# Altium PCB TL200_V1.1-后板.PcbDoc
Units mm, origin at the board's own origin, x right, y up, seen from the top; angles counter-clockwise.
Board outline 61.7 x 69.78 mm, 2 copper layers (Top Layer, Bottom Layer); 54 components, 38 nets, 158 pads, 350 vias.
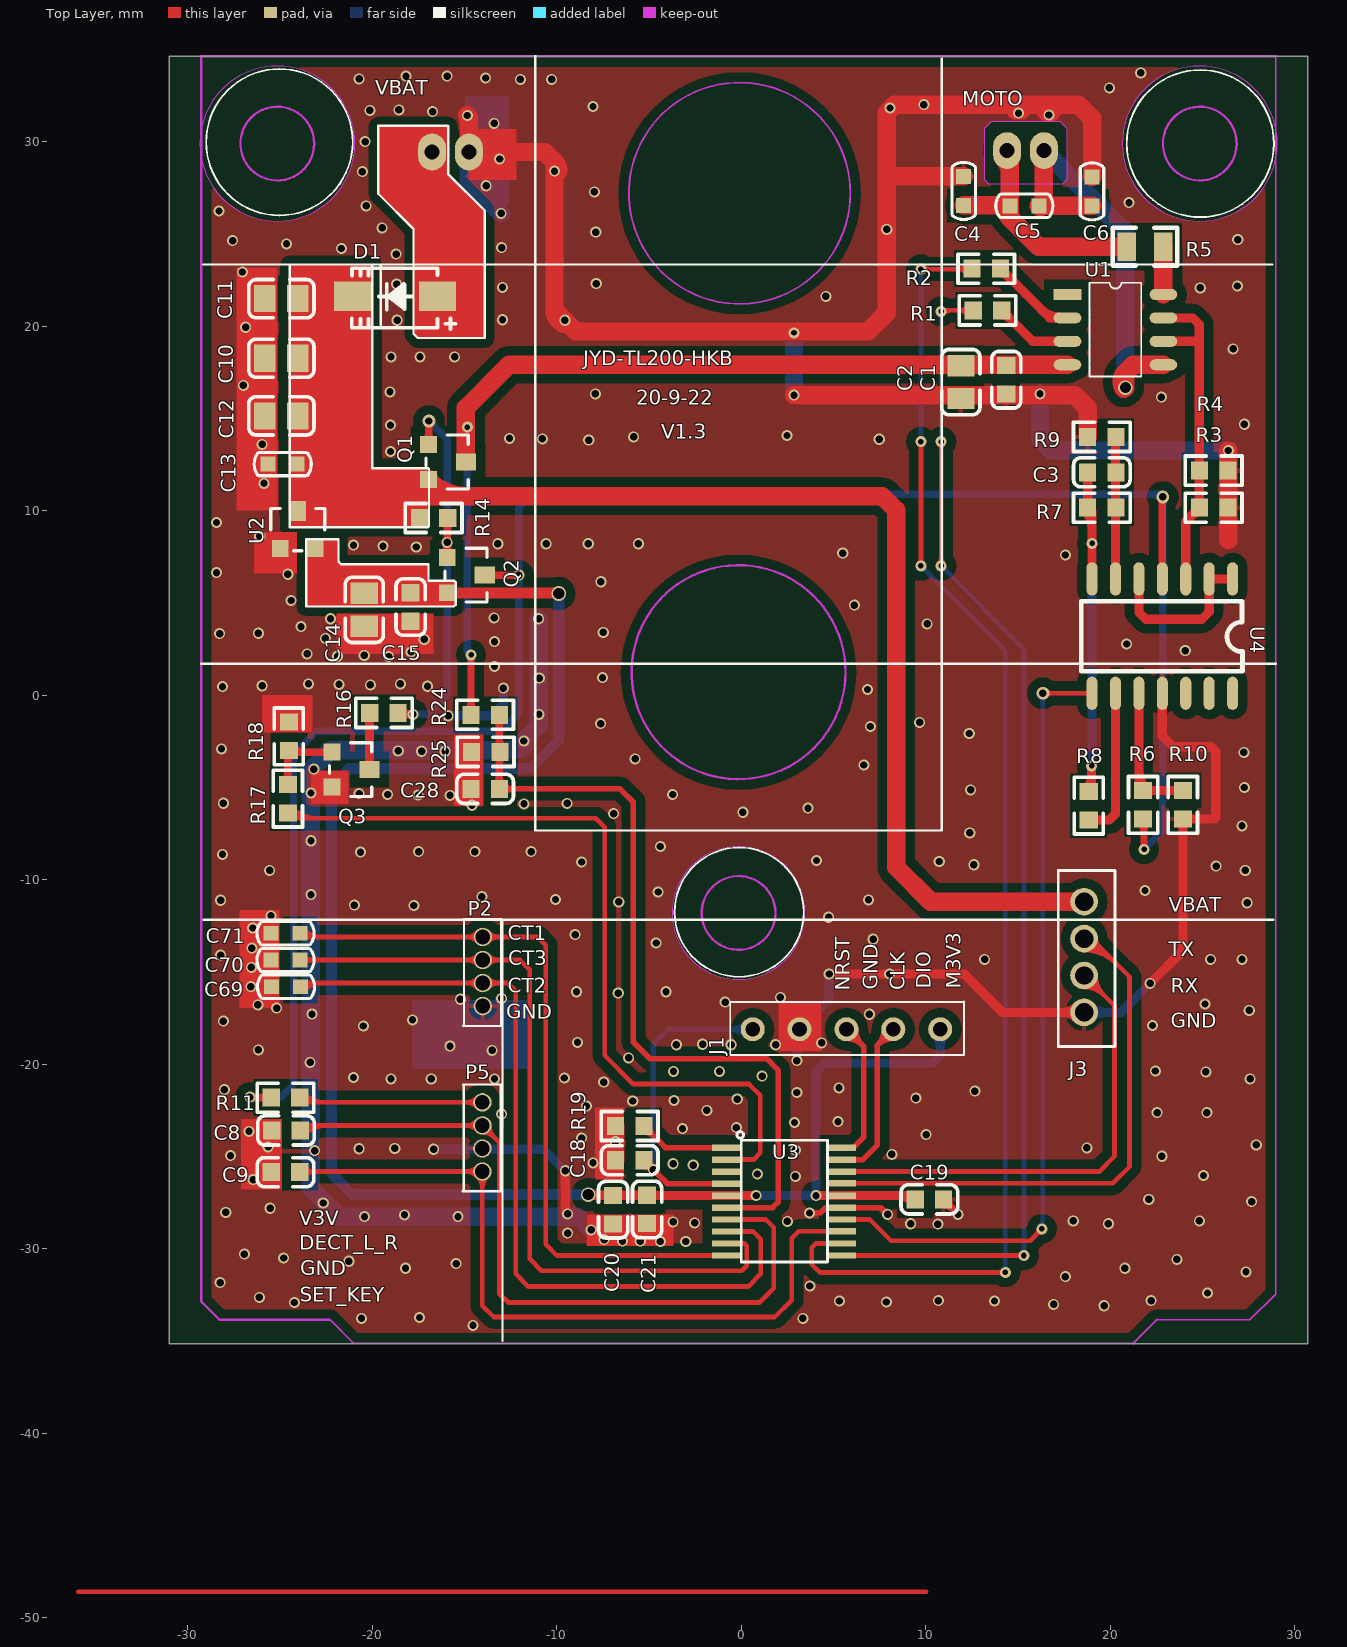
[diagram p0: Top Layer view]
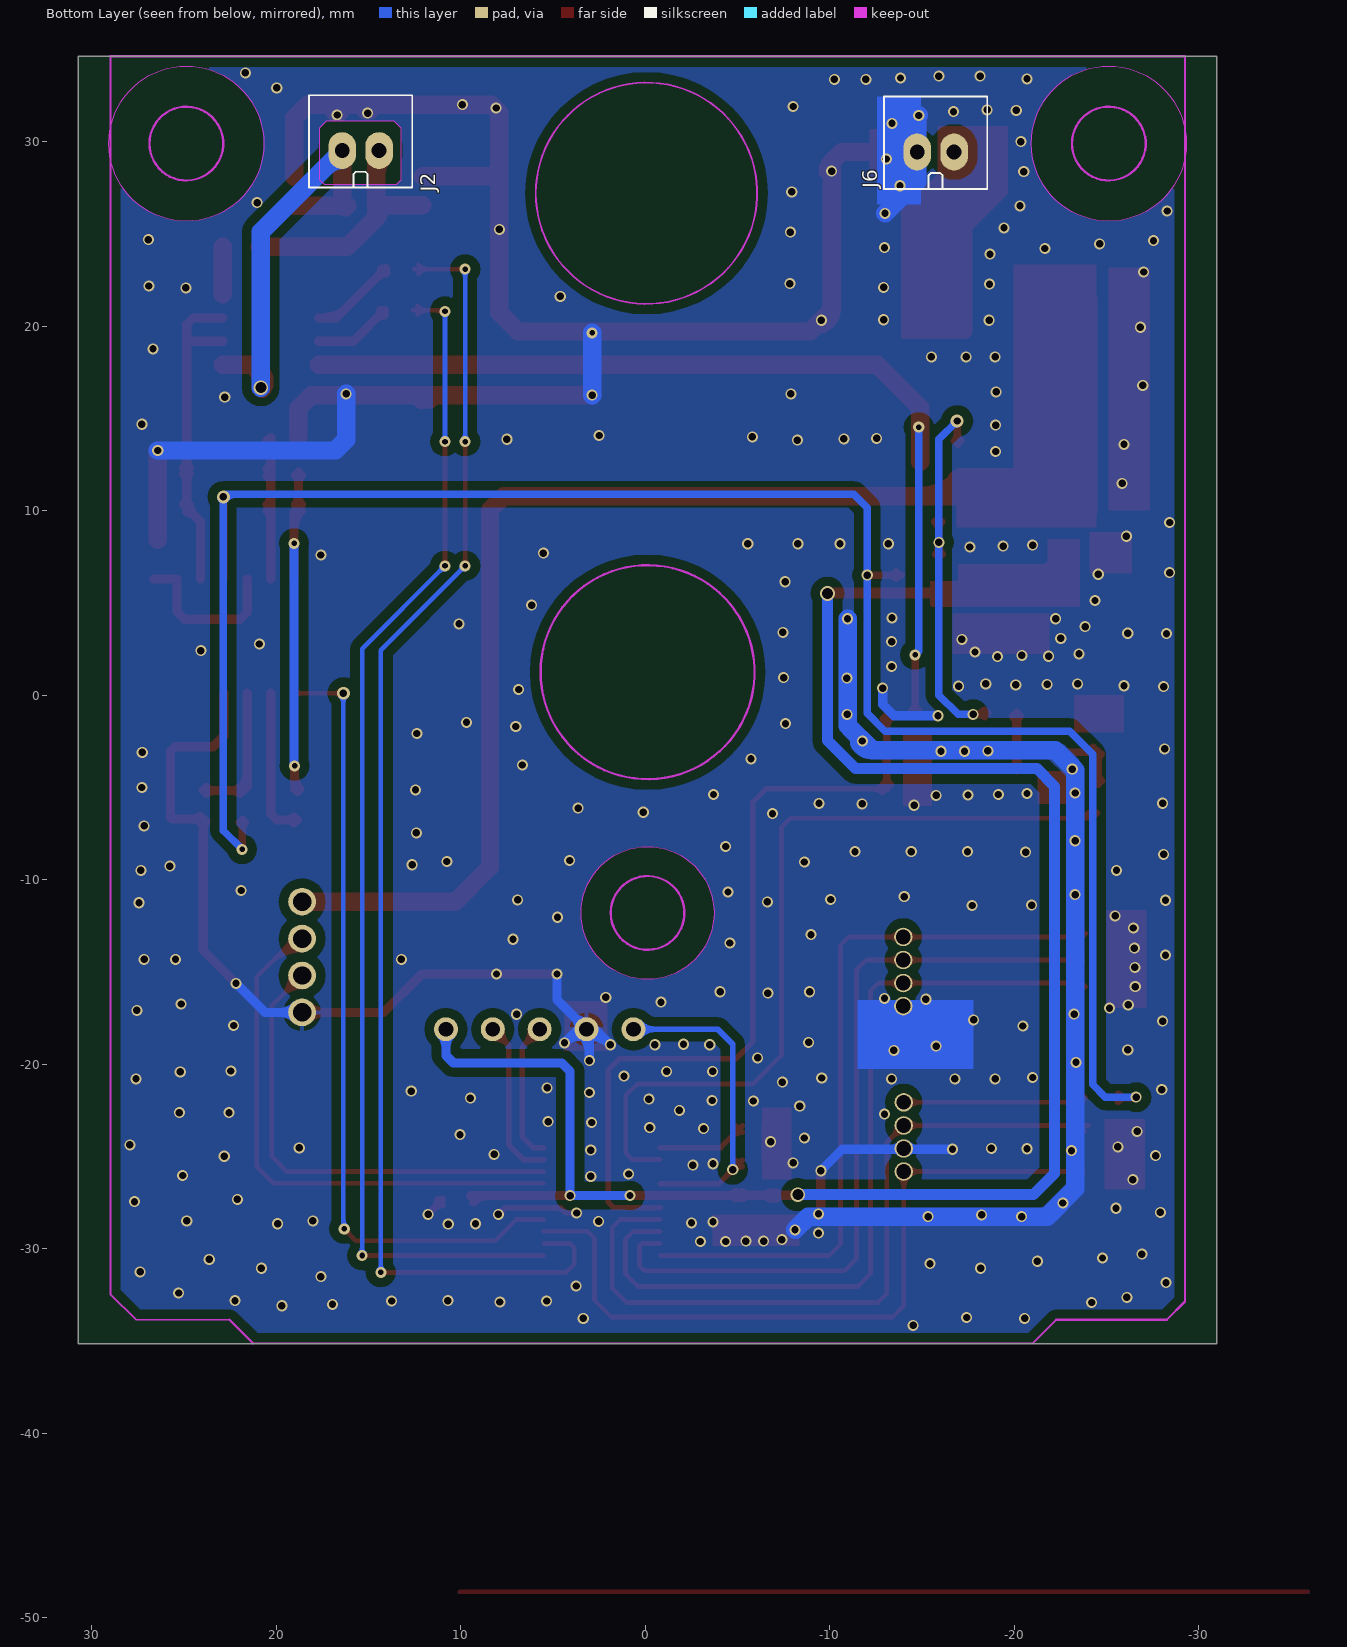
[diagram p1: Bottom Layer view, seen from below]
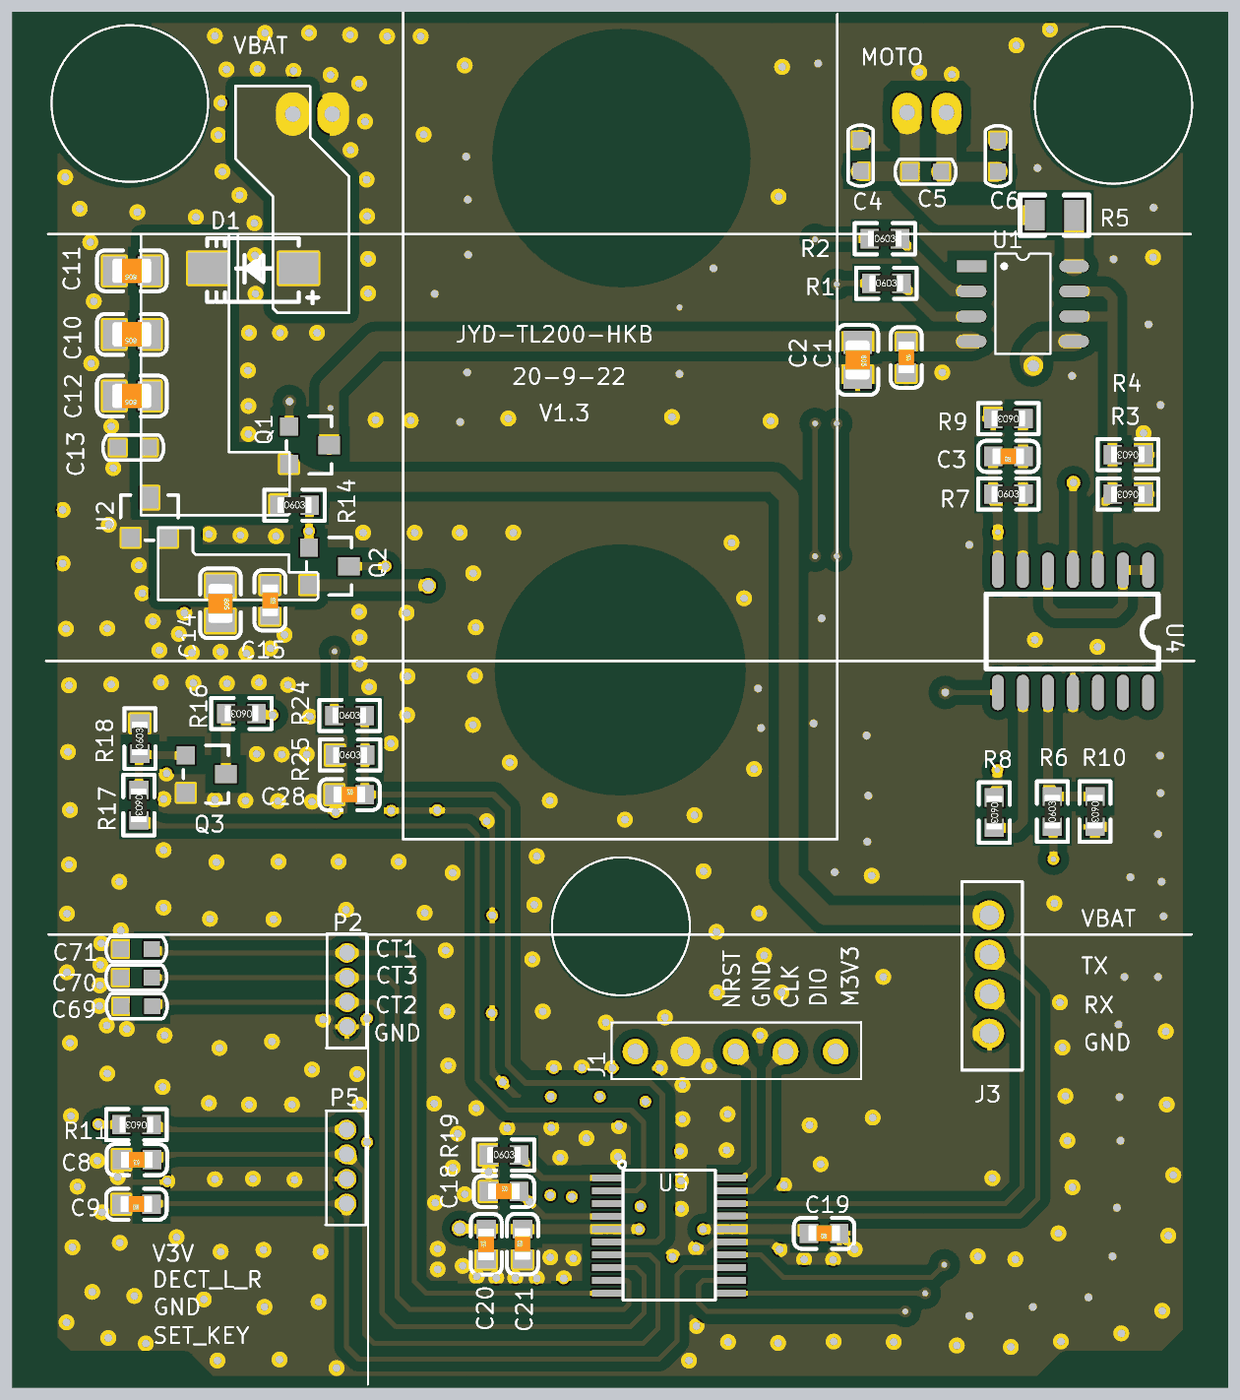
[diagram p2: 3D render of the assembled board from above, using the file's embedded part models]

## Layer stack, top to bottom
Top Layer: signal copper 0.0356
Dielectric: core 0.32, FR-4, Dk 4.8
Bottom Layer: signal copper 0.0356

## Board outline
-30.986,34.62 -30.986,-35.158 30.716,-35.158 30.716,34.62 -30.986,34.62

## Design rules (kind name [scope] priority, off if disabled: settings)
Clearance Clearance_1 [All] p1: gap=0.1
Clearance [All] p2 off: gap=0.5
ComponentClearance [All] p1: gap=0 collisioncheckmode=3 verticalgap=0 showdistances=FALSE
FabricationTestpoint [(IsPad And (OnTopLayer Or OnBottomLayer))] p1: side=3 testpointundercomponent=TRUE minsize=1.016 maxsize=2.54 preferedsize=1.524 minholesize=0 maxholesize=1.016 preferedholesize=0.813 testpointgrid=0.025 allowsidetop=TRUE allowsidebottom=TRUE usegrid=TRUE gridtolerance=0
HoleToHoleClearance [All] p1: gap=0 allowstackedmicrovias=TRUE
MinimumSolderMaskSliver [All] p1: minsoldermaskwidth=0
PolygonConnect PolygonConnect_1 [IsVia] p1: connectstyle=Direct reliefconductorwidth=0.254 reliefentries=4 polygonreliefangle="90 Angle" airgapwidth=0.254
PolygonConnect [All] p2: connectstyle=Relief reliefconductorwidth=0.254 reliefentries=4 polygonreliefangle="90 Angle" airgapwidth=0.254
RoutingVias [All] p1: holewidth=0.3 width=0.6 viastyle="Through Hole" minholewidth=0.2 minwidth=0.5 maxholewidth=0.4 maxwidth=0.7
SilkToSilkClearance [All] p1: silktosilkclearance=0
SilkToSolderMaskClearance [IsPad] p1: minsilkscreentomaskgap=0 clearancetoexposedcopper=TRUE
SolderMaskExpansion [All] p1: expansion=0.102
Width [All] p1: maxlimit=2 minlimit=0.2 preferedwidth=0.254
22 further rules are at their usual default settings.

## Components (designator, comment, footprint, x,y, rotation, side; value= is the part's Value field where it differs from the comment)
C1 "0.1uF" LC-0603_C 14.376,17.094 r270 top
C2 "22uF" LC-0805_C 11.913,16.967 r270 top
C3 "0.1uF" LC-0603_C 19.558,12.078 r180 top
C4 "100nF" C0603 12.065,27.33 r270 top
C5 "100nF" C0603 15.354,26.518 r0 top
C6 "100nF" C0603 19.025,27.305 r90 top
C8 "10nF" LC-0603_C -24.663,-23.597 r180 top
C9 "100nF" LC-0603_C -24.689,-25.857 r180 top
C10 "47uF/16V" LC-0805_C -24.917,18.263 r180 top
C11 "22uF/16V" LC-0805_C -24.917,21.488 r180 top
C12 "10uF/16V" LC-0805_C -24.917,15.138 r180 top
C13 "100nF" C0603 -24.841,12.522 r180 top
C14 "10uF/10V" LC-0805_C -20.422,4.623 r270 top
C15 "100nF" LC-0603_C -17.907,4.775 r270 top
C18 "100nF" LC-0603_C -6.033,-25.208 r0 top
C19 "1uF/6.3V" LC-0603_C 10.211,-27.33 r180 top
C20 "1uF/6.3V" LC-0603_C -6.934,-27.889 r90 top
C21 "100nF" LC-0603_C -5.094,-27.875 r90 top
C28 "10NF" LC-0603_C -13.868,-5.08 r0 top
C69 "10nF" C0603 -24.663,-15.808 r180 top
C70 "10nF" C0603 -24.689,-14.36 r180 top
C71 "10nF" C0603 -24.689,-12.912 r180 top
D1 "SS14" M7 -16.459,21.615 r180 top
J1 "2.54mm烧录口" "5P-2.54mm - duplicate" 10.795,-18.11 r180 top
J2 "CON2" 2PIN-2.0 15.418,29.515 r180 bottom locked
J3 "CON4/NP" 4p-2.0xx 18.593,-17.196 r90 top
J6 "CON2" 2PIN-2.0 -15.748,29.439 r180 bottom locked
P2 "Header 4" 4P-1.25 -13.995,-13.106 r270 top locked
P5 "Header 4" 4P-1.25 -14.021,-22.073 r270 top locked
Q1 "SI2301" "SOT-23 - GDS" -15.926,12.644 r270 top
Q2 "SI2301" "SOT-23 - GDS" -14.91,6.502 r270 top
Q3 "PMBT3904" "SOT-23 - BCE" -21.158,-4.039 r270 top
R1 "10K" LC-0603_R 13.36,20.853 r0 top
R2 "10K" LC-0603_R 13.291,23.114 r0 top
R3 "0R68" LC-0603_R 25.621,10.16 r180 top
R4 "0R68" LC-0603_R 25.621,12.167 r180 top
R5 "2.2R" 0805_R 21.895,24.308 r0 top
R6 "10K" LC-0603_R 21.793,-5.944 r90 top
R7 "100K" LC-0603_R 19.558,10.16 r0 top
R8 "100K" LC-0603_R 18.847,-5.994 r270 top
R9 "10K" LC-0603_R 19.558,13.995 r180 top
R10 "100K" LC-0603_R 23.952,-5.944 r270 top
R11 "100K" LC-0603_R -24.689,-21.819 r180 top
R14 "100K" LC-0603_R -16.662,9.601 r0 top
R16 "1K" LC-0603_R -19.355,-0.965 r180 top
R17 "4.7K" LC-0603_R -24.562,-5.613 r270 top
R18 "10K" LC-0603_R -24.511,-2.235 r90 top
R19 "10K" LC-0603_R -6.033,-23.354 r0 top
R24 "20K1%" LC-0603_R -13.868,-1.067 r0 top
R25 "10K1%" LC-0603_R -13.843,-3.073 r0 top
U1 "CP2117" SOP8 20.295,19.812 r0 top
U2 "jc5333" SOT-23-3L -24.028,8.966 r0 top
U3 "STM32F030F4P6" TSSOP20L1xx -0.014,-24.523 r0 top
U4 "LMV324B-SR" SOIC-14_L8.7-W3.9-P1.27-LS6.0-BL 22.835,3.2 r180 top

## Footprints (in the part's own frame and the unit in brackets; to place one, negate y for a bottom-side part, rotate by r counter-clockwise, add the part's x,y. Pads: shape width x height; smd on the part's side, far side on the other; paste and mask are expansions set on the pad)
2PIN-2.0 [mm]
  oval 1.5x2 hole 0.8: 1(-1,0) 2(1,0)
  silkscreen extent -2.8,-2 2.79,3
4P-1.25 [mm]
  round 1 hole 0.8: 1(0,0) 2(1.25,0) 3(2.5,0) 4(3.75,0)
  silkscreen extent -0.97,-1.07 4.83,0.99
4p-2.0xx [mm]
  round 1.5 hole 1: 1(0,0) 2(2,0) 3(4,0) 4(6,0)
  silkscreen extent -1.85,-1.68 7.7,1.4
"5P-2.54mm - duplicate" [mm]
  round 1.3 hole 0.8: 1(0,0) 2(2.54,0) 3(5.08,0) 4(7.62,0) 5(10.16,0)
  silkscreen extent -1.3,-1.5 11.38,1.4
0805_R [mm]
  rect 1x1.55 smd: 1(-1,0) 2(1,0)
  silkscreen extent -1.75,-1.02 1.75,1.02
C0603 [mil]
  rect 32x31.5 smd: 1(-31,0) 2(31,0)
  silkscreen extent -61,-25 61,25
LC-0603_C [mm]
  rect 0.93x0.98 smd: 1(-0.77,0) 2(0.77,0)
  silkscreen extent -1.53,-0.79 1.54,0.79, body extent -0.8,-0.4 0.8,0.4, height 0.3
LC-0603_R [mm]
  rect 0.93x0.98 smd: 1(-0.77,0) 2(0.77,0)
  silkscreen extent -1.53,-0.79 1.54,0.79, body extent -0.85,-0.4 0.85,0.4, height 0.56
LC-0805_C [mm]
  rect 1.16x1.47 smd: 1(-0.89,0) 2(0.89,0)
  silkscreen extent -1.77,-1.04 1.77,1.04, body extent -1,-0.62 1,0.63, height 0.77
M7 [mm]
  rect 2x1.6 smd: A(0,0) K(4.6,0)
  silkscreen extent -1,-1.53 4.64,1.78
SOIC-14_L8.7-W3.9-P1.27-LS6.0-BL [mm]
  oval 0.6x1.798 smd: 1(-3.81,-3.1) 2(-2.54,-3.1) 3(-1.27,-3.1) 4(0,-3.1) 5(1.27,-3.1) 6(2.54,-3.1) 7(3.81,-3.1) 8(3.81,3.1) 9(2.54,3.1) 10(1.27,3.1) 11(0,3.1) 12(-1.27,3.1) 13(-2.54,3.1) 14(-3.81,3.1)
  silkscreen extent -4.34,-1.9 4.4,1.91
SOP8 [mm]
  rect 1.5x0.6 smd mask+0.05: 1(-2.6,1.905)
  oval 1.5x0.6 smd mask+0.05: 2(-2.6,0.635) 3(-2.6,-0.635) 4(-2.6,-1.905) 5(2.6,-1.905) 6(2.6,-0.635) 7(2.6,0.635) 8(2.6,1.905)
  round 0.4 on Top Overlay mask+0.05: ""(-0.949,1.905)
  silkscreen extent -1.4,-2.54 1.4,2.54
"SOT-23 - BCE" [mil]
  rect 36x36 smd: B(-37.4,-40) E(37.4,-40)
  rect 36x43.31 smd: C(0,40)
  silkscreen extent -57,-45 58,45
"SOT-23 - GDS" [mil]
  rect 36x43.31 smd: D(0,40)
  rect 36x36 smd: G(-37.4,-40) S(37.4,-40)
  silkscreen extent -57,-45 58,45
SOT-23-3L [mil]
  rect 36x36 smd: 1(-37.4,-40) 2(37.4,-40)
  rect 36x43.31 smd: 3(0,40)
  silkscreen extent -57,-45 58,45
TSSOP20L1xx [mm]
  rect 1.5x0.35 smd: 1(-0.8,0) 2(-0.8,-0.65) 3(-0.8,-1.3) 4(-0.8,-1.95) 5(-0.8,-2.6) 6(-0.8,-3.25) 7(-0.8,-3.9) 8(-0.8,-4.55) 9(-0.8,-5.2) 10(-0.8,-5.85) 11(5.5,-5.85) 12(5.5,-5.2) 13(5.5,-4.535) 14(5.5,-3.9) 15(5.5,-3.25) 16(5.5,-2.6) 17(5.5,-1.935) 18(5.5,-1.3) 19(5.5,-0.65) 20(5.5,0)
  silkscreen extent -0.21,-6.2 4.7,0.87

## Part data
C1 C2 C3 C15 C69 C70 C71: library part CAP-NP, "Capacitor, Ceramic"
C4 C5 C6 C8 C9 C13 C18 C19 C20 C21 C28: library part "CAP NP"
C10 C11: library part "Cap Pol3", "Polarized Capacitor (Surface Mount)"
C12 C14: library part CAP-P, "Capacitor, tolerance ±20%"
D1: library part D
J1: library part "Header 5", "Header, 5-Pin"
J3: library part CON4
P2 P5: "Header, 4-Pin"
Q1 Q2: library part PWRMOSFET_EP_DGS_0
R1 R2 R7 R8 R9: library part Pro71C3.TMP_UnNamed_1
R3 R4 R5 R19 R24 R25: library part R_Dup1
R6 R10 R14 R16 R17 R18: library part R
R11: library part Res2, "Resistor"
U1: library part AM24LC02_0
U2: library part XC6206P302M
U3: library part Component_1

## Via types
v1: diameter 0.6, hole 0.4, Top Layer to Bottom Layer, 289 vias
v2: diameter 0.6, hole 0.4, Top Layer to Bottom Layer, tented both sides, 40 vias
v3: diameter 0.6, hole 0.3, Top Layer to Bottom Layer, tented both sides, 12 vias
v4: diameter 0.6, hole 0.3, Top Layer to Bottom Layer, 3 vias
v5: diameter 0.8, hole 0.6, Top Layer to Bottom Layer, 3 vias
v6: diameter 0.7, hole 0.4, Top Layer to Bottom Layer, tented both sides, 2 vias
v7: diameter 0.7, hole 0.4, Top Layer to Bottom Layer, 1 vias

## Nets (pads, with @x,y where several pads share a name; then routed paths per layer and width w, separated by ;. In a path a pad name is that pad's centre, name@x,y a point inside that pad or via, vN(x,y) a via of type N, cw(c..) or ccw(c..) an arc to the next point about the centre after c; other vN are vias at no path point)
BAT_DET: C28.2 R24.2 R25.2 U3.6 | length 48.4
  Top Layer w0.3: C28.2 -6.553,-5.08 -5.842,-5.791 -5.842,-18.796 -4.928,-19.71 1.397,-19.71 2.007,-20.32 2.007,-27.483 1.717,-27.773 U3.6 ; C28.2@-12.876,-5.303 cw(c-12.338,-5.84) -12.338,-5.08 cw(c-12.338,-4.32) C28.2@-12.876,-4.857
  Top Layer w0.4: C28.2@-13.286,-4.868 ccw(c-13.738,-4.415) -13.098,-4.415 ccw(c-12.459,-4.415) C28.2@-12.911,-4.868 ; R24.2@-13.286,-1.279 cw(c-13.738,-1.732) -13.098,-1.732 cw(c-12.459,-1.732) R24.2@-12.911,-1.279 ; R25.2@-13.26,-3.286 cw(c-13.651,-3.677) -13.098,-3.677 ; R25.2@-13.26,-2.861 ccw(c-13.651,-2.47) -13.098,-2.47 ; C28.2 R24.2 ; -13.098,-3.799 cw(c-12.372,-3.799) R25.2@-12.886,-3.286 ; -13.098,-2.347 ccw(c-12.372,-2.347) R25.2@-12.886,-2.861
DECT_L_R: C8.1 P5.2 U3.7 | length 46
  Top Layer w0.254: C8.1@-24.054,-23.323 P5.2 -13.106,-24.237 -13.106,-32.436 -12.624,-32.918 1.016,-32.918 1.778,-32.156 1.778,-28.854 1.346,-28.423 U3.7 ; C8.1@-23.834,-23.631 cw(c-23.089,-24.376) -23.089,-23.323 ; C8.1@-23.654,-23.811 cw(c-22.476,-24.989) -22.476,-23.323 ; P5.2@-14.285,-23.586 ccw(c-14.921,-24.223) -14.921,-23.323 ccw(c-14.921,-22.422) P5.2@-14.285,-23.059 ; P5.2@-14.021,-23.696 cw(c-14.021,-24.596) -13.384,-23.959 cw(c-12.747,-23.323) P5.2@-13.648,-23.323
DETECT1: C71.1 P2.1 U3.10 | length 44.2
  Top Layer w0.254: C71.1 -23.707,-13.106 -22.649,-13.106 P2.1 -11.049,-13.106 -10.592,-13.564 -10.592,-29.769 -9.988,-30.373 U3.10 ; C71.1@-23.882,-12.899 ccw(c-23.381,-12.398) -23.381,-13.106 ; C71.1@-23.702,-12.719 ccw(c-22.768,-11.785) -22.768,-13.106 ; P2.1@-14.259,-13.37 ccw(c-14.896,-14.007) -14.896,-13.106 ccw(c-14.896,-12.206) P2.1@-14.259,-12.843 ; P2.1@-13.732,-13.37 cw(c-13.095,-14.007) -13.095,-13.106 cw(c-13.095,-12.206) P2.1@-13.732,-12.843
DETECT2: C69.1 P2.3 U3.8 | length 49.5
  Top Layer w0.254: C69.1 -23.674,-15.606 P2.3 -12.638,-15.606 -12.217,-16.027 -12.217,-31.369 -11.532,-32.055 0.381,-32.055 1.067,-31.369 1.067,-29.489 0.65,-29.073 U3.8 ; C69.1@-23.856,-15.821 cw(c-23.337,-16.341) -23.337,-15.606 ; C69.1@-23.677,-16.001 cw(c-22.724,-16.954) -22.724,-15.606 ; P2.3@-14.259,-15.87 ccw(c-14.896,-16.507) -14.896,-15.606 ccw(c-14.896,-14.706) P2.3@-14.259,-15.343 ; P2.3@-13.732,-15.87 cw(c-13.095,-16.507) -13.095,-15.606 cw(c-13.095,-14.706) P2.3@-13.732,-15.343
DETECT3: C70.1 P2.2 U3.9 | length 46.4
  Top Layer w0.254: C70.1@-23.729,-14.391 -23.694,-14.356 P2.2 -11.983,-14.356 -11.455,-14.884 -11.455,-30.556 -10.82,-31.191 0.051,-31.191 0.305,-30.937 0.305,-29.842 0.186,-29.723 U3.9 ; C70.1@-23.702,-14.553 cw(c-23.227,-15.028) -23.227,-14.356 ; C70.1@-23.702,-14.167 ccw(c-23.245,-13.71) -23.245,-14.356 ; P2.2@-14.259,-14.62 ccw(c-14.896,-15.257) -14.896,-14.356 ccw(c-14.896,-13.456) P2.2@-14.259,-14.093 ; P2.2@-13.732,-14.62 cw(c-13.095,-15.257) -13.095,-14.356 cw(c-13.095,-13.456) P2.2@-13.732,-14.093
EN_FAULT: U3.14 U4.8 | length 46.7
  Top Layer w0.254: U3.14 6.985,-28.423 8.128,-29.566 15.672,-29.566 v3(16.307,-28.931) ; v3@16.134,-28.931 cw(c15.716,-28.931) 16.011,-29.226 cw(c16.307,-29.521) v3@16.307,-29.104 ; v6(16.358,0.102) U4.8 U4.8 ; v6@16.515,-0.056 cw(c16.896,-0.437) 16.896,0.102 cw(c16.896,0.64) v6@16.515,0.259 ; 18.604,0.102 cw(c18.604,-0.32) U4.8@18.902,-0.022 ; 18.61,0.102 ccw(c18.61,0.515) U4.8@18.902,0.223
  Bottom Layer w0.254: v3@16.184,-28.808 ccw(c15.767,-28.39) 16.358,-28.39 ; v6@16.2,-0.056 cw(c15.819,-0.437) 16.358,-0.437 cw(c16.896,-0.437) v6@16.515,-0.056 ; v3(16.307,-28.931) 16.358,-28.88 v6(16.358,0.102)
GND: C1.2 C2.2 C4.1 C6.2 C8.2 C9.2 C10.2 C11.2 C12.2 C13.2 C14.2 C15.2 C18.1 C19.1 C20.1 C21.1 C28.1 C69.2 C70.2 C71.2 J1.4 J3.1 J6.1 P2.4 P5.3 Q3.E R3.1 R4.1 R9.2 R10.2 R18.2 R19.1 R25.1 U2.1 U3.15 U4.11 | length 267.6
  Top Layer w0.3: v1(3.708,-28.067) 4.293,-28.067 4.587,-27.773 U3.15 7.58,-27.773 v1(7.95,-28.143) ; v1@3.814,-28.173 cw(c4.071,-28.429) 4.071,-28.067 cw(c4.071,-27.705) v1@3.814,-27.961 ; 4.315,-28.045 cw(c4.911,-28.641) U3.15@4.911,-27.798 ; v1@7.8,-28.143 ccw(c7.438,-28.143) 7.694,-27.887 ccw(c7.95,-27.631) v1@7.95,-27.993
  Top Layer w0.4: C19.1@10.981,-27.62 cw(c10.981,-28.24) C19.1@11.419,-27.802 ; C19.1 10.981,-27.364 v1(11.76,-28.143) ; C19.1@11.246,-27.355 ccw(c11.906,-27.355) 11.439,-27.822
  Top Layer w0.5: -9.525,-27.69 ccw(c-8.971,-27.69) v1@-9.363,-28.082 ; v1(-9.525,-25.781) -9.525,-27.991 v1(-9.398,-28.118) ; v1(4.775,-15.113) v1(8.052,-15.113) 12.09,-15.113 14.173,-17.196 J3.1 ; J3.1@18.239,-17.549 ccw(c17.386,-18.403) 17.386,-17.196 ccw(c17.386,-15.989) J3.1@18.239,-16.842 ; v1(22.174,-15.621) 23.952,-13.843 R10.2 25.646,-6.714 25.73,-6.629 25.73,-3.048 25.476,-2.794 23.419,-2.794 22.835,-2.21 U4.11 ; R10.2@23.8,-6.866 cw(c23.433,-7.233) 23.952,-7.233 cw(c24.471,-7.233) R10.2@24.104,-6.866 ; R10.2@24.129,-6.866 cw(c24.496,-7.233) 24.496,-6.714 cw(c24.496,-6.195) R10.2@24.129,-6.562
  Top Layer w1: v1(-14.834,31.42) -14.748,31.334 J6.1 -10.643,29.439 -10.109,28.905 ; C28.1@-14.613,-5.055 R25.1 ; -13.518,29.439 cw(c-13.518,28.621) v1@-12.94,29.199 ; v1@-13.222,29.199 cw(c-12.644,28.621) -12.644,29.439 ; -10.127,28.923 cw(c-10.653,28.397) v1@-9.909,28.397 ; -10.109,21.186 ccw(c-8.684,21.186) v2@-9.692,20.179 ; v1@-9.909,28.387 ccw(c-10.593,28.421) -10.109,28.905 ; v2@-9.634,20.138 cw(c-9.295,20.879) -10.109,20.879 ; C18.1 R19.1 ; v2(2.87,16.256) C2.2@11.734,16.256 ; 7.899,28.118 C4.1 ; 11.133,16.256 cw(c11.133,15.452) C2.2@11.701,16.021 ; C2.2 C2.2@11.734,16.256 ; C2.2@12.124,16.021 cw(c12.692,15.452) 12.692,16.256 ; 14.416,32.004 cw(c14.416,30.926) v1@15.178,31.688 ; v1@14.895,31.688 cw(c15.658,30.926) 15.658,32.004 ; 15.822,32.004 cw(c15.822,30.579) v1@16.829,31.587 ; v1@16.546,31.587 cw(c17.554,30.579) 17.554,32.004 ; R9.2 18.788,15.553 18.085,16.256 C2.2@11.734,16.256 ; C6.2 19.025,31.267 18.288,32.004 8.331,32.004 7.899,31.572 7.899,20.726 6.883,19.71 -8.941,19.71 -10.109,20.879 ; 26.416,8.407 v1(26.416,13.259) ; -10.109,20.879 v1(-10.109,28.397) -10.109,28.905
  Bottom Layer w0.5: v1(-16.662,-24.613) -10.693,-24.613 v1(-9.525,-25.781) ; v1(-15.875,-1.118) -13.487,-1.118 -12.878,-0.508 v1(-12.878,0.381) ; -14.721,-24.613 ccw(c-14.721,-23.872) P5.3@-14.198,-24.396 ; -14.528,-24.613 cw(c-14.528,-25.08) P5.3@-14.198,-24.749 ; P5.3@-13.844,-24.749 cw(c-13.514,-25.08) -13.514,-24.613 ; P5.3@-13.844,-24.396 ccw(c-13.321,-23.872) -13.321,-24.613 ; v1(3.023,-19.812) J1.4@3.023,-18.11 ; 3.023,-19.444 cw(c4.509,-19.444) J1.4@3.458,-18.393 ; J1.4@3.132,-18.508 ccw(c2.965,-20.034) v1(1.88,-18.948) 2.718,-18.11 J1.4@3.023,-18.11 ; J1.4@3.175,-17.71 ccw(c3.175,-16.745) 3.858,-17.427 ccw(c4.541,-18.11) J1.4@3.575,-18.11 ; J1.4@3.25,-18.503 cw(c3.485,-19.73) v1(4.369,-18.847) 3.632,-18.11 J1.4 ; v1(4.775,-15.113) 4.775,-16.51 J1.4 ; J3.1 20.599,-17.196 v1(22.174,-15.621) ; J3.1@18.946,-17.549 cw(c19.8,-18.403) 19.8,-17.196 cw(c19.8,-15.989) J3.1@18.946,-16.842 ; J1.4@3.023,-18.11 J1.4
  Bottom Layer w1: v1(-14.834,31.42) -14.748,31.334 J6.1 -14.748,27.854 v1(-13.005,26.111) ; -14.647,27.753 ccw(c-13.818,28.583) v1@-13.818,27.41 ; v1@-14.018,27.61 ccw(c-12.845,27.61) -13.674,26.78 ; -12.507,-2.987 ccw(c-12.507,-1.75) v1@-11.632,-2.625 ; v1@-11.602,-2.586 cw(c-12.309,-2.164) -12.309,-2.987 ; v1(-10.973,4.14) -10.973,-1.651 -12.309,-2.987 ; v1(-8.128,-28.981) -8.839,-28.27 v1(-15.342,-28.27) -21.793,-28.27 -23.317,-26.746 -23.317,-4.064 -22.24,-2.987 -18.694,-2.987 -12.309,-2.987 ; v2(2.87,16.256) v3(2.87,19.634) ; v1(16.205,16.332) 16.205,13.843 16.789,13.259 v1(26.416,13.259)
  other v1: -14.529,-34.163 -20.574,-33.782 3.353,-33.782 -17.424,-33.731 19.685,-33.096 16.942,-33.02 -24.206,-32.918 7.874,-32.893 5.334,-32.842 13.741,-32.842 10.693,-32.817 22.225,-32.817 -26.111,-32.639 25.285,-32.405 3.734,-32.029 -28.233,-31.846 27.368,-31.262 -18.186,-31.064 -15.443,-30.81 -21.26,-30.683 -24.79,-30.505 -26.924,-30.302 -4.369,-29.616 -2.997,-29.616 -6.426,-29.591 -5.461,-29.591 -7.417,-29.515 -9.398,-29.159 10.668,-28.677 9.195,-28.651 19.914,-28.651 -2.515,-28.6 -3.683,-28.55 2.515,-28.524 18.009,-28.499 -20.41,-28.264 -18.237,-28.169 -27.928,-28.036 -25.527,-27.813 -22.645,-27.528 27.672,-27.452 22.098,-27.33 -26.441,-26.264 2.946,-26.086 0.889,-25.959 -2.591,-25.476 -3.683,-25.4 -8.026,-25.349 22.809,-24.994 -27.674,-24.962 8.179,-24.892 -23.114,-24.689 2.946,-24.663 -20.701,-24.587 -18.771,-24.562 18.745,-24.536 -25.629,-24.486 27.926,-24.378 -6.807,-24.206 -8.636,-24.003 10.033,-23.825 -26.67,-23.647 -3.175,-23.495 -0.254,-23.444 2.896,-23.165 5.258,-23.114 -12.979,-22.708 22.555,-22.631 -1.854,-22.504 -8.382,-22.276 -5.867,-21.996 -3.632,-21.971 -0.203,-21.895 9.474,-21.844 3.023,-21.539 12.675,-21.463 -28.004,-21.381 5.309,-21.285 -7.442,-20.98 -18.974,-20.803 -16.789,-20.803 -13.36,-20.803 27.596,-20.797 -9.576,-20.752 -21.006,-20.726 1.143,-20.65 -3.658,-20.396 -1.168,-20.396 22.454,-20.371 -23.356,-19.908 -6.096,-19.66 -13.487,-19.253 -26.162,-19.228 -15.773,-19.025 -3.505,-18.948 -0.533,-18.948 -2.083,-18.923 -8.865,-18.821 -20.472,-17.932 22.301,-17.907 -28.055,-17.673 -17.805,-17.602 -23.255,-17.292 6.96,-17.297 27.545,-17.088 -25.171,-16.967 -26.187,-16.789 -0.864,-16.637 -15.215,-16.485 -12.979,-16.434 2.134,-16.383 -6.655,-16.154 -8.915,-16.078 -4.064,-16.078 -26.568,-15.799 -26.543,-14.757 13.208,-14.326 -28.208,-14.091 -26.518,-13.716 -4.597,-13.437 7.163,-13.233 -8.992,-12.979 -26.467,-12.624 4.75,-12.04 -25.476,-11.963 -17.729,-11.405 -20.955,-11.379 -6.629,-11.201 -28.208,-11.119 6.909,-11.1 -10.058,-11.074 -14.046,-10.922 -23.305,-10.815 -4.496,-10.668 21.895,-10.592 -25.552,-9.5 12.624,-9.195 -8.636,-9.042 4.089,-8.966 -28.106,-8.63 -20.625,-8.509 -17.475,-8.484 -14.427,-8.484 -11.379,-8.484 -4.369,-8.204 -23.305,-7.894 -6.909,-6.426 0.102,-6.35 3.632,-6.121 -14.58,-5.969 -11.76,-5.893 -28.055,-5.862 -9.423,-5.867 -15.773,-5.436 -17.501,-5.41 -19.152,-5.385 -3.708,-5.385 -20.701,-5.334 -23.305,-5.303 -23.153,-4.007 6.655,-3.785 -5.74,-3.454 -17.311,-3.042 -16.041,-3.042 -18.581,-3.017 -28.157,-2.915 -11.774,-2.483 -7.608,-1.544 -10.947,-1.041 -28.106,0.463 -16.993,0.483 -25.959,0.508 -20.091,0.559 -21.793,0.584 -23.444,0.61 -18.466,0.61 -10.936,0.92 -7.507,0.946 -13.36,1.549 -19.101,2.083 -21.869,2.108 -20.422,2.159 -23.52,2.235 -17.882,2.337 24.079,2.413 20.904,2.769 -13.36,2.896 -17.17,3.023 -22.53,3.073 -28.258,3.333 -26.162,3.353 -7.468,3.404 -23.851,3.708 -22.25,4.14 -13.386,4.191 6.147,4.877 -24.384,5.131 -7.595,6.147 -24.562,6.553 -28.429,6.642 5.512,7.696 -17.602,8.026 -19.406,8.077 -21.006,8.128 -13.183,8.204 -10.566,8.204 -8.28,8.204 -5.563,8.204 -26.086,8.611 -28.429,9.36 -25.857,11.481 -18.999,13.208 -25.959,13.589 7.493,13.868 -10.77,13.894 -12.548,13.919 -5.817,13.995 2.489,14.072 -18.999,14.63 -19.025,16.434 -26.975,16.789 -18.974,18.339 -17.399,18.339 -15.519,18.339 -26.848,19.939 -18.644,20.32 -12.929,20.345 -12.929,22.098 26.899,22.174 -18.669,22.276 -27.026,22.936 -18.694,23.901 -21.666,24.206 -12.979,24.257 -24.638,24.46 -27.559,24.638 7.899,25.248 -19.456,25.324 -28.296,26.238 -20.32,26.518 -13.818,27.61 -20.523,28.372 -13.081,29.058 -20.371,29.997 -13.386,30.988 16.688,31.445 15.037,31.547 -16.713,31.623 -20.117,31.699 -18.542,31.725 8.077,31.826 -8.026,31.902 19.964,32.918 -11.963,33.376 -10.262,33.376 -20.701,33.401 -13.843,33.452 -18.161,33.553 -15.926,33.553 21.666,33.731
  other v2: 17.577,-31.521 20.803,-31.064 23.622,-30.582 24.841,-28.499 25.07,-26.035 25.248,-22.631 25.197,-20.422 25.146,-16.739 25.451,-14.326 27.153,-14.326 27.432,-11.252 27.33,-9.5 25.756,-9.271 10.744,-9.017 12.395,-7.468 27.153,-7.087 12.446,-5.131 27.28,-5.004 27.254,-3.099 12.37,-2.083 7.01,-1.702 9.677,-1.473 6.858,0.305 10.084,3.861 17.577,7.595 -8.255,13.818 27.28,14.681 22.784,16.154 -7.899,16.332 26.67,18.771 -9.55,20.32 4.597,21.615 24.892,22.073 -7.849,22.301 26.924,24.689 -7.874,25.095 21.031,26.695 -7.95,27.28 9.906,32.004
M3V3: C14.1 C15.1 C19.2 C20.2 C21.2 J1.1 Q2.S U2.2 U3.5 U3.16 | length 115
  Top Layer w0.5: v5@-8.28,-27.105 C21.2 ; v5@-8.174,-26.97 ccw(c-7.848,-26.644) -7.848,-27.105 ; -7.512,-27.105 cw(c-7.512,-27.672) C20.2@-7.111,-27.271 ; -7.445,-27.105 ccw(c-7.445,-26.633) C20.2@-7.111,-26.967 ; C20.2@-6.757,-27.271 cw(c-6.357,-27.672) -6.357,-27.105 ; C20.2@-6.757,-26.967 ccw(c-6.423,-26.633) -6.423,-27.105 ; -6.045,-27.123 U3.5 v1(0.817,-27.123) ; -5.679,-27.123 ccw(c-5.679,-26.545) -5.271,-26.953 cw(c-5.638,-26.586) -5.638,-27.105 cw(c-5.638,-27.624) -5.271,-27.257 ccw(c-5.596,-27.583) -5.596,-27.123 ; C21.2@-4.917,-27.257 cw(c-4.591,-27.583) -4.591,-27.123 ; C21.2@-4.917,-26.953 ccw(c-4.508,-26.545) -4.508,-27.123 ; v1(4.064,-27.127) U3.16@5.486,-27.127 ; U3.16 9.436,-27.123 C19.2@9.453,-27.139 ; 8.48,-27.123 cw(c8.48,-28.266) C19.2@9.289,-27.457
  Top Layer w0.6: U2.2 -23.078,6.035 -22.589,5.545 C15.1 Q2.S@-15.984,5.545 ; -21.331,5.545 cw(c-21.331,4.759) C14.1@-20.775,5.315 ; -21.174,5.545 ccw(c-21.174,6.111) C14.1@-20.775,5.711 ; C14.1@-20.069,5.315 cw(c-19.512,4.759) -19.512,5.545 ; C14.1@-20.069,5.711 ccw(c-19.669,6.111) -19.669,5.545 ; Q2.S -15.919,5.545 v5@-9.881,5.545
  Bottom Layer w0.5: v1(0.817,-27.123) 4.059,-27.123 v1(4.064,-27.127) 4.064,-20.396 4.521,-19.939 10.389,-19.939 10.795,-19.533 J1.1 ; J1.1@10.512,-18.393 cw(c9.829,-19.076) 10.795,-19.076 cw(c11.761,-19.076) J1.1@11.078,-18.393
  Bottom Layer w0.6: v5@-9.881,5.613 v5(-9.881,5.512) -9.881,-2.464 -11.404,-3.987 -21.234,-3.987 -22.2,-4.952 -22.2,-25.933 -21.057,-27.076 v5(-8.28,-27.076)
MOTO+: C4.2 C5.1 J2.2 R5.1 | length 15.9
  Top Layer w1: C4.2 14.542,26.543 C5.1 ; J2.2@14.241,29.088 cw(c13.454,28.301) 14.567,28.301 ; J2.2 14.567,29.366 C5.1 ; C5.1@14.473,26.518 ccw(c15.811,26.518) 14.865,25.572 ; C5.1@14.489,26.571 ccw(c14.966,26.269) 14.567,25.87 ; R5.1 16.129,24.308 14.567,25.87 ; 14.567,25.87 C5.1
MOTO-: C5.2 C6.1 J2.1 U1.5 | length 27.1
  Top Layer w1: C5.2 C6.1 ; C5.2@16.219,26.447 ccw(c15.738,26.927) 16.418,26.927 ; C5.2@16.418,26.794 J2.1 ; v5@20.728,16.662 cw(c22.449,16.662) 21.232,17.879 ; v5@20.745,16.606 cw(c21.313,16.991) 20.828,17.475 ; v5(20.828,16.662) 20.828,17.475 ; U1.5 21.26,17.907 20.828,17.475
  Bottom Layer w1: J2.1@16.418,29.015 cw(c16.418,27.808) 17.271,28.661 ; J2.1 20.828,25.105 v5(20.828,16.662)
NetC3_1: C3.1 R7.2 R9.1 U4.6 | length 10.1
  Top Layer w0.5: U4.6 R9.1@20.295,13.962 ; 20.295,9.535 cw(c20.928,9.535) R7.2@20.48,9.983 ; 20.295,10.785 ccw(c20.928,10.785) R7.2@20.48,10.337 ; 20.295,11.453 cw(c20.928,11.453) C3.1@20.48,11.901 ; 20.295,12.702 ccw(c20.928,12.702) C3.1@20.48,12.255 ; 20.295,13.371 cw(c20.928,13.371) R9.1@20.48,13.818
NetC3_2: C3.2 R7.1 R8.1 U4.7 | length 22.8
  Top Layer w0.5: R7.1@18.636,9.983 cw(c17.698,9.045) 19.025,9.045 ; R7.1@18.636,10.337 ccw(c18.269,10.704) 18.788,10.704 ccw(c19.307,10.704) R7.1@18.94,10.337 ; C3.2@18.636,11.901 cw(c18.269,11.534) 18.788,11.534 cw(c19.307,11.534) C3.2@18.94,11.901 ; R8.1@18.72,-5.072 ccw(c18.045,-4.398) 18.999,-4.398 ; C3.2 R7.1 19.025,9.923 v4(19.025,8.23) U4.7 ; R8.1 18.999,-5.072 v4(18.999,-3.835)
  Bottom Layer w0.5: v4(18.999,-3.835) 19.025,-3.81 v4(19.025,8.23)
NetD1_A: D1.A J6.2 | length 8.5
  Top Layer w1: D1.A@-16.729,21.641 J6.2@-16.729,29.337 ; -16.729,22.507 ccw(c-15.767,22.507) D1.A@-16.447,21.828
NetP5_1: P5.1 R11.1 | length 13.3
  Top Layer w0.254: R11.1@-23.859,-21.784 ccw(c-23.163,-21.088) -23.163,-22.073 ; R11.1@-23.847,-21.887 -23.662,-22.073 P5.1 ; R11.1@-23.68,-21.605 ccw(c-22.55,-20.475) -22.55,-22.073 ; P5.1@-14.285,-22.336 ccw(c-14.921,-22.973) -14.921,-22.073 ccw(c-14.921,-21.172) P5.1@-14.285,-21.809
NetQ1_G: Q1.G Q2.G R14.2 R16.1 | length 28
  Top Layer w0.4: R16.1 -18.509,-1.041 v1(-17.78,-1.041) ; R16.1@-18.397,-1.178 cw(c-18.069,-1.506) v1@-18.069,-1.041 ; R16.1@-18.397,-0.803 ccw(c-17.821,-0.227) v1@-17.821,-1.041 ; R16.1@-18.176,-1.07 cw(c-18.067,-1.479) v1@-17.835,-1.125 ; Q1.G@-17.124,13.776 ccw(c-17.624,14.276) -16.916,14.276 ; v6@-17.022,14.753 cw(c-17.279,14.497) -16.916,14.497 cw(c-16.554,14.497) v6@-16.81,14.753 ; Q1.G -16.916,13.62 v6(-16.916,14.859) ; -16.916,14.154 ccw(c-16.382,14.154) Q1.G@-16.76,13.776 ; Q2.G@-16.108,7.634 ccw(c-16.547,8.073) -15.926,8.073 ccw(c-15.305,8.073) Q2.G@-15.744,7.634 ; R14.2@-16.08,9.389 cw(c-16.452,9.017) -15.926,9.017 ; v1@-16.012,8.23 cw(c-16.38,8.018) Q2.G@-15.97,7.908 ; Q2.G v1(-15.926,8.28) -15.926,9.568 R14.2 ; -15.926,8.856 cw(c-15.172,8.856) R14.2@-15.705,9.389 ; Q2.G@-15.882,7.908 cw(c-15.472,8.018) v1@-15.839,8.23
  Bottom Layer w0.4: v1(-17.78,-1.041) -16.967,-1.041 -15.926,0 v1(-15.926,8.28) -15.926,13.868 v6(-16.916,14.859) ; v6@-16.916,14.709 cw(c-16.916,14.347) -16.66,14.603 cw(c-16.404,14.859) v6@-16.766,14.859
NetQ3_B: Q3.B R17.1 R18.1 | length 7.9
  Top Layer w0.4: R17.1@-24.749,-4.656 ccw(c-25.202,-4.204) -24.562,-4.204 ccw(c-23.922,-4.204) R17.1@-24.374,-4.656 ; R18.1@-24.723,-3.193 cw(c-25.113,-3.583) -24.562,-3.583 ; R17.1 -24.562,-3.056 R18.1 -24.428,-3.089 Q3.B ; -24.562,-3.707 cw(c-23.834,-3.707) R18.1@-24.349,-3.193 ; R18.1@-24.299,-2.818 ccw(c-23.645,-2.164) -23.645,-3.089 ; Q3.B@-22.356,-3.27 ccw(c-22.795,-3.71) -22.795,-3.089 ccw(c-22.795,-2.468) Q3.B@-22.356,-2.907
NetQ3_C: Q3.C R16.2 | length 4.7
  Top Layer w0.5: Q3.C@-20.289,-3.892 ccw(c-20.642,-3.538) -20.142,-3.538 ccw(c-19.642,-3.538) Q3.C@-19.996,-3.892 ; R16.2@-20.277,-1.142 cw(c-20.602,-1.467) -20.142,-1.467 ; Q3.C -20.142,-0.983 R16.2 ; -20.142,-1.551 cw(c-19.564,-1.551) R16.2@-19.973,-1.142
NetR1_2: R1.2 U1.3 | length 5.1
  Top Layer w0.5: R1.2@14.13,20.613 cw(c14.13,20.034) R1.2@14.54,20.444 ; R1.2 15.807,19.177 16.332,19.177 U1.3 ; R1.2@14.345,20.828 ccw(c14.804,20.828) R1.2@14.48,20.504
NetR2_2: R2.2 U1.2 | length 6.6
  Top Layer w0.5: R2.2@14.061,22.874 cw(c14.061,22.295) R2.2@14.47,22.704 ; R2.2 15.425,21.75 16.728,20.447 U1.2 ; R2.2@14.276,23.089 ccw(c14.734,23.089) R2.2@14.41,22.765 ; 16.277,20.898 ccw(c17.245,21.866) U1.2@17.245,20.497
NetR3_2: R3.2 R4.2 U1.6 U1.7 U4.3 | length 21.4
  Top Layer w0.5: U1.6 24.232,19.177 24.841,19.177 ; U1.7 24.486,20.447 24.841,20.091 24.841,19.177 ; U4.3 24.105,9.414 R3.2 24.841,10.169 24.841,18.567 24.841,19.177 ; R3.2@24.441,9.75 cw(c24.851,9.341) R3.2@24.851,9.92 ; R3.2@24.501,9.811 ccw(c24.177,10.135) R3.2@24.636,10.135 ; R3.2@24.699,10.337 ccw(c24.354,10.681) 24.841,10.681 ; R4.2@24.699,11.99 cw(c24.354,11.645) 24.841,11.645 ; R4.2@24.699,12.344 ccw(c24.354,12.688) 24.841,12.688 ; 24.841,10.727 ccw(c25.392,10.727) R3.2@25.003,10.337 ; 24.841,11.6 cw(c25.392,11.6) R4.2@25.003,11.99 ; 24.841,12.733 ccw(c25.392,12.733) R4.2@25.003,12.344
NetR5_2: R5.2 U1.8 | length 2.6
  Top Layer w1: U1.8 R5.2
NetR6_2: R6.2 R10.1 U4.10 | length 10.1
  Top Layer w0.5: 21.565,-4.163 ccw(c22.779,-4.163) R6.2@21.92,-5.022 ; U4.10 21.565,-4.945 R6.2 R10.1 ; R6.2@21.97,-5.326 cw(c22.337,-5.693) 22.337,-5.174 cw(c22.337,-4.655) R6.2@21.97,-5.022 ; R10.1@23.775,-5.326 ccw(c23.408,-5.693) 23.408,-5.174 ccw(c23.408,-4.655) R10.1@23.775,-5.022
NetR8_2: R8.2 U4.9 | length 8.9
  Top Layer w0.5: R8.2 19.956,-6.764 20.295,-6.426 U4.9 ; R8.2@19.024,-6.916 cw(c19.391,-7.283) 19.391,-6.764 cw(c19.391,-6.245) R8.2@19.024,-6.612
NetR19_2: R19.2 U3.1 | length 6.1
  Top Layer w0.3: R19.2@-5.263,-23.694 cw(c-5.263,-24.515) -4.683,-23.935 ; R19.2 -4.095,-24.523 U3.1 ; R19.2@-4.948,-23.379 ccw(c-4.248,-23.379) -4.743,-23.874
NetU4_1: U4.1 U4.2 U4.5 | length 9
  Top Layer w0.5: U4.5 21.565,4.496 21.946,4.115 24.968,4.115 25.375,4.521 U4.2 U4.1
NRST: C18.2 J1.5 U3.4 | length 23.3
  Top Layer w0.3: C18.2@-5.263,-25.548 cw(c-5.263,-26.369) v1@-4.683,-25.789 ; C18.2 -3.999,-26.473 U3.4 ; C18.2@-5.039,-25.583 ccw(c-4.924,-25.384) C18.2@-4.819,-25.589 ; C18.2@-5.025,-25.592 cw(c-5.164,-25.833) v1@-4.895,-25.761 ; C18.2@-4.948,-25.233 ccw(c-4.248,-25.233) v1@-4.743,-25.728 ; v1@-4.9,-25.722 ccw(c-5.262,-25.722) -5.006,-25.466 ccw(c-4.75,-25.21) v1@-4.75,-25.572 ; C18.2@-4.893,-25.679 ccw(c-5.212,-25.582) -4.924,-25.416 ccw(c-4.626,-25.244) v1@-4.712,-25.577 ; v1@-4.75,-25.872 cw(c-4.75,-26.234) -4.494,-25.978 cw(c-4.238,-25.722) v1@-4.6,-25.722
  Bottom Layer w0.3: v1@-4.856,-25.616 ccw(c-5.112,-25.36) -4.75,-25.36 ccw(c-4.388,-25.36) v1@-4.644,-25.616 ; v1(-4.75,-25.722) -4.75,-18.923 -3.937,-18.11 J1.5 ; J1.5@0.281,-18.464 ccw(c-0.572,-19.317) -0.572,-18.11 ccw(c-0.572,-16.903) J1.5@0.281,-17.757
PH: R1.1 U3.11 | length 71
  Top Layer w0.254: U3.11 v3(15.336,-30.373) ; v3@10.723,7.133 ccw(c10.428,7.428) 10.846,7.428 ccw(c11.263,7.428) v3@10.968,7.133 ; v3@10.723,13.619 cw(c10.428,13.324) 10.846,13.324 cw(c11.263,13.324) v3@10.968,13.619 ; v3(10.846,7.01) v3(10.846,13.741) ; v3(10.846,20.803) 10.897,20.853 R1.1 ; v3@10.968,20.68 cw(c11.386,20.262) 11.386,20.853 ; R1.1@12.351,20.614 ccw(c11.774,20.037) 11.774,20.853 ccw(c11.774,21.669) R1.1@12.351,21.092 ; v3@15.213,-30.495 ccw(c14.918,-30.79) 14.918,-30.373 ccw(c14.918,-29.955) v3@15.213,-30.25
  Bottom Layer w0.254: v3@10.723,13.864 ccw(c10.428,14.159) 10.846,14.159 ccw(c11.263,14.159) v3@10.968,13.864 ; v3@10.723,20.68 cw(c10.428,20.385) 10.846,20.385 cw(c11.263,20.385) v3@10.968,20.68 ; v3@10.846,6.837 cw(c10.846,6.42) 11.141,6.715 cw(c11.436,7.01) v3@11.019,7.01 ; v3(10.846,7.01) 15.336,2.52 v3(15.336,-30.373) ; v3(10.846,13.741) v3(10.846,20.803) ; v3@15.213,-30.25 ccw(c14.918,-29.955) 15.336,-29.955 ccw(c15.753,-29.955) v3@15.458,-30.25
PWM: R2.1 U3.12 | length 78.9
  Top Layer w0.254: U3.12 4.059,-29.723 3.835,-29.947 3.835,-30.861 4.267,-31.293 v3(14.326,-31.293) ; v3@9.631,7.133 ccw(c9.336,7.428) 9.754,7.428 ccw(c10.171,7.428) v3@9.876,7.133 ; v3@9.631,13.619 cw(c9.336,13.324) 9.754,13.324 cw(c10.171,13.324) v3@9.876,13.619 ; v3(9.754,7.01) v3(9.754,13.741) ; v3(9.754,23.089) 12.495,23.089 R2.1 ; v3@9.876,22.966 cw(c10.171,22.671) 10.171,23.089 cw(c10.171,23.506) v3@9.876,23.211 ; 11.704,23.089 ccw(c11.704,23.906) R2.1@12.282,23.328 ; 11.706,23.089 cw(c11.706,22.274) R2.1@12.282,22.85 ; v3@14.203,-31.415 ccw(c13.908,-31.71) 13.908,-31.293 ccw(c13.908,-30.875) v3@14.203,-31.17
  Bottom Layer w0.254: v3@9.631,13.864 ccw(c9.336,14.159) 9.754,14.159 ccw(c10.171,14.159) v3@9.876,13.864 ; v3@9.631,22.966 cw(c9.336,22.671) 9.754,22.671 cw(c10.171,22.671) v3@9.876,22.966 ; v3@9.754,6.837 cw(c9.754,6.42) 10.049,6.715 cw(c10.344,7.01) v3@9.927,7.01 ; v3(9.754,7.01) 14.326,2.438 v3(14.326,-31.293) ; v3(9.754,13.741) v3(9.754,23.089) ; v3@14.203,-31.17 ccw(c13.908,-30.875) 14.326,-30.875 ccw(c14.743,-30.875) v3@14.448,-31.17
PWR_CTL: R17.2 U3.2 | length 46.7
  Top Layer w0.254: R17.2 -24.265,-6.68 -7.874,-6.68 -7.391,-7.163 -7.391,-19.533 -5.842,-21.082 0.432,-21.082 1.041,-21.692 1.041,-24.816 0.685,-25.173 U3.2 ; R17.2@-24.477,-6.324 ccw(c-23.617,-5.464) -23.617,-6.68 ; R17.2@-24.298,-6.144 ccw(c-23.004,-4.851) -23.004,-6.68
REMOTE_COLSE: U3.3
SET_KEY: C9.1 P5.4 U3.13 | length 44.8
  Top Layer w0.254: C9.1@-23.757,-25.797 -23.732,-25.823 P5.4 -14.021,-33.096 -13.411,-33.706 1.829,-33.706 2.743,-32.791 2.743,-29.439 3.124,-29.058 U3.13 ; C9.1@-23.68,-26.071 cw(c-23.08,-26.671) -23.08,-25.823 ; C9.1@-23.68,-25.593 ccw(c-23.126,-25.039) -23.126,-25.823 ; P5.4@-14.285,-25.559 cw(c-14.921,-24.922) -14.921,-25.823 cw(c-14.921,-26.723) -14.285,-26.086 cw(c-14.921,-26.723) -14.021,-26.723 cw(c-13.12,-26.723) P5.4@-13.757,-26.086
SWCLK/REMOTE_ON: J1.3 U3.20 | length 9.5
  Top Layer w0.3: U3.20 6.084,-24.523 6.655,-23.952 6.655,-19.05 J1.3 ; J1.3@5.715,-18.61 cw(c5.715,-19.817) 6.569,-18.964 cw(c7.422,-18.11) J1.3@6.215,-18.11
SWDIO: J1.2 U3.19 | length 10.4
  Top Layer w0.3: U3.19 6.603,-25.173 7.391,-24.384 7.391,-18.974 J1.2@8.014,-18.351 ; J1.2@7.755,-18.11 cw(c6.548,-18.11) 7.401,-18.964 cw(c8.255,-19.817) J1.2@8.255,-18.61
UART_RX: J3.2 U3.18 | length 29.3
  Top Layer w0.254: U3.18 19.415,-25.823 20.244,-24.994 20.244,-16.847 J3.2 ; J3.2@18.593,-15.819 cw(c18.593,-17.323) 19.656,-16.259 cw(c20.72,-15.196) J3.2@19.216,-15.196 ; J3.2@18.593,-15.565 cw(c18.593,-16.456) 19.223,-15.826 cw(c19.853,-15.196) J3.2@18.962,-15.196
UART_TX: J3.3 U3.17 | length 34.3
  Top Layer w0.254: U3.17 20.151,-26.458 21.057,-25.552 21.057,-15.265 18.987,-13.196 J3.3 ; J3.3@18.593,-13.819 cw(c18.593,-16.275) 20.329,-14.538 ; J3.3@18.593,-13.565 cw(c18.593,-15.407) 19.896,-14.104 ; J3.3@18.593,-13.311 cw(c18.593,-14.54) 19.462,-13.671 ; J3.3@19.216,-13.196 ccw(c19.768,-13.196) 19.378,-13.586
V3V: Q2.D R6.1 R11.2 U4.4 | length 113.6
  Top Layer w0.4: v1(-26.619,-21.793) -26.594,-21.819 R11.2 ; v1@-26.548,-21.722 ccw(c-26.316,-21.49) -26.316,-21.819 ; R11.2@-25.646,-22.006 ccw(c-26.099,-22.458) -26.099,-21.819 ccw(c-26.099,-21.179) R11.2@-25.646,-21.631 ; Q2.D v1(-12.04,6.502) ; Q2.D@-13.619,6.321 cw(c-13.18,5.881) -13.18,6.502 cw(c-13.18,7.123) Q2.D@-13.619,6.684 ; R6.1@21.631,-6.901 cw(c21.116,-7.416) 21.844,-7.416 ; R6.1 21.844,-6.764 v4(21.844,-8.357) ; 21.844,-7.291 cw(c22.396,-7.291) R6.1@22.006,-6.901 ; U4.4 22.835,10.719 v7(22.86,10.744) ; 22.835,10.321 cw(c23.283,10.321) v7@22.966,10.638
  Bottom Layer w0.4: v1(-26.619,-21.793) -24.943,-21.793 -24.257,-21.107 -24.257,-3.2 -23.012,-1.956 -13.005,-1.956 -12.04,-0.991 v1(-12.04,6.502) -12.04,10.16 -11.303,10.897 22.708,10.897 v7(22.86,10.744) 22.86,-7.341 v4(21.844,-8.357) ; 22.13,10.897 cw(c22.13,10.014) 22.754,10.638 cw(c22.498,10.382) 22.86,10.382 cw(c23.222,10.382) v7@22.966,10.638
VBAT: C10.1 C11.1 C12.1 C13.1 D1.K J3.4 Q1.S R14.1 U2.3 | length 83.3
  Top Layer w0.5: R14.1@-17.584,9.778 ccw(c-17.951,10.145) -17.432,10.145 ccw(c-16.913,10.145) R14.1@-17.28,9.778 ; R14.1 -17.432,10.787 ; -17.432,10.663 cw(c-16.529,10.663) Q1.S@-16.865,11.502 ; -17.432,11.402 cw(c-16.825,11.402) Q1.S@-17.051,11.966 ; Q1.S@-17.149,11.694 cw(c-17.649,11.694) -17.296,11.34 cw(c-16.942,10.987) Q1.S@-16.942,11.487 ; Q1.S -17.432,11.204 -17.432,10.787 ; -14.63,10.719 -17.364,10.719 -17.432,10.787
  Top Layer w1: U2.3 C12.1 -24.027,21.447 -23.859,21.615 D1.K ; -17.432,10.787 -17.428,10.791 7.649,10.791 8.407,10.033 8.407,-9.322 10.281,-11.196 J3.4 ; Q1.S@-16.972,11.664 ccw(c-14.865,13.771) -14.865,10.791 ; -17.163,11.056 ccw(c-17.801,11.694) -16.899,11.694 cw(c-17.801,11.694) -17.163,11.056
VIN: C1.1 C2.1 Q1.D R24.1 U1.4 | length 53.8
  Top Layer w0.4: v3@-14.91,14.249 -14.63,14.529 v3(-14.834,14.529) ; R24.1@-14.826,-0.854 ccw(c-15.278,-0.402) -14.638,-0.402 ccw(c-13.999,-0.402) R24.1@-14.451,-0.854 ; R24.1 -14.638,2.176 v3(-14.63,2.184)
  Top Layer w1: Q1.D -14.91,14.249 -14.91,15.57 -12.573,17.907 U1.4
  Bottom Layer w0.4: v3(-14.834,14.529) -14.834,2.388 v3(-14.63,2.184)
pads on no net: U1. U1.1 U4.12 U4.13 U4.14
copper on no net: | length 45.9
  Top Layer w0.254: -35.916,-48.59 10.033,-48.59

## Polygon pours and split planes (outlines as drawn)
GND on Bottom Layer "Top Layer-No Net" (solid, remove dead copper, pour order 4): -29.261,34.62 28.981,34.62 28.981,-33.909 27.737,-35.154 27.559,-34.976 -29.286,-34.976
GND on Top Layer "Top Layer-No Net" (solid, remove dead copper, pour order 3): -29.261,34.671 28.981,34.671 28.981,-33.858 27.737,-35.103 27.559,-34.925 -29.286,-34.925

## Keep-outs
Keep-Out Layer:
  circle w0.127: c-0.135,1.245 r5.8
  circle w0.127: c-0.135,-11.805 r2
  circle w0.127: c-25.135,29.895 r2
  circle w0.127: c24.865,29.895 r2
  circle w0.1: c-0.076,27.203 r6
  pour cut-out: 13.208,30.734 13.589,31.115 17.272,31.115 17.653,30.734 17.653,27.94 17.399,27.686 13.462,27.686 13.208,27.94
  pour cut-out: -0.135,-8.205 ccw(c-0.135,-11.805) -3.735,-11.805 ccw(c-0.135,-11.805) -0.135,-15.405 ccw(c-0.135,-11.805) 3.465,-11.805 ccw(c-0.135,-11.805)
  pour cut-out: 24.865,34.095 ccw(c24.865,29.895) 20.665,29.895 ccw(c24.865,29.895) 24.865,25.695 ccw(c24.865,29.895) 29.065,29.895 ccw(c24.865,29.895)
  pour cut-out: -25.135,34.095 ccw(c-25.135,29.895) -29.335,29.895 ccw(c-25.135,29.895) -25.135,25.695 ccw(c-25.135,29.895) -20.935,29.895 ccw(c-25.135,29.895)
  lines w0.1: -22.276,-33.858 -21.006,-35.128 21.26,-35.128 ; 22.53,-33.858 27.584,-33.858 28.981,-32.461 28.981,34.544
  lines w0.127: -29.261,34.569 -29.261,-32.868 -28.27,-33.858 -22.276,-33.858 ; -29.261,34.62 28.981,34.62 ; 21.26,-35.128 22.53,-33.858

## Other copper
Top Layer:
  rectangle net GND: -21.923,2.235 -16.662,4.428
  rectangle net GND: -27.356,10.008 -25.121,23.165
  rectangle net GND: -27.106,-26.792 -24.892,-22.987
  rectangle net GND: -27.178,-16.967 -25.019,-11.659
  rectangle net GND: -8.382,-29.855 -3.654,-28.143
  rectangle net GND: 2.032,-19.279 4.369,-16.586
  rectangle net GND: -7.925,-26.264 -6.35,-22.353
  rectangle net GND: -15.548,-6.015 -13.97,-2.139
  rectangle net GND: -25.956,-2.032 -23.239,0
  rectangle net GND: -23.343,-5.89 -21.273,-4.104
  rectangle net GND: -14.748,27.915 -12.167,30.693
  rectangle net GND: -26.391,6.604 -24.077,8.852
  region net VBAT: -24.46,23.317 -24.46,9.093 -16.891,9.093 -16.891,12.294 -19.99,12.294 -19.99,23.317
  region net NetD1_A: -19.66,30.836 -19.66,27.153 -17.729,25.222 -17.729,19.558 -17.501,19.329 -13.894,19.329 -13.894,26.289 -15.875,28.27 -15.875,30.836
  region net M3V3: -23.571,8.458 -21.819,8.458 -21.819,7.264 -21.641,7.087 -16.967,7.087 -16.967,6.172 -15.469,6.172 -15.469,4.877 -15.545,4.801 -23.571,4.801
Bottom Layer:
  rectangle net GND: -14.961,26.594 -12.573,32.446
  rectangle net GND: -17.805,-20.269 -11.506,-16.526

## Silkscreen, mask and mechanical layers (free items; w line width, h text height)
Top Overlay:
  circle w0.1: c-0.102,-11.76 r3.5
  circle w0.1: c-25.019,29.972 r3.971
  circle w0.1: c24.892,29.896 r3.989
  lines w0.1: -12.929,-35.001 -12.929,-12.294
  lines w0.127: -29.261,1.702 28.981,1.702 ; -29.159,23.343 -25.171,23.343 28.804,23.343 ; -29.134,-12.167 28.854,-12.167 ; -24.46,23.343 -24.46,9.093 -16.993,9.093 -16.916,9.169 -16.916,12.273 -16.937,12.294 -19.99,12.294 -19.99,23.317 ; -19.66,28.016 -19.66,30.861 -15.9,30.861 -15.875,30.836 -15.875,28.245 -13.894,26.264 -13.894,22.098 -13.894,19.355 -17.526,19.355 ; -19.66,28.092 -19.66,27.178 -17.755,25.273 -17.755,19.583 -17.526,19.355 ; -19.533,20.066 -19.533,23.241 ; -17.551,19.38 -17.526,19.355 ; -11.151,34.62 -11.151,12.897 -11.151,-7.341 10.88,-7.341 10.88,12.897 10.88,34.493 ; -23.571,4.801 -23.571,8.458 -21.844,8.458 -21.819,8.433 -21.819,7.239 -21.666,7.087 -16.942,7.087 -16.942,6.198 -15.545,6.198 -15.469,6.121 -15.469,4.902 -15.57,4.801 -23.571,4.801
  text "VBAT" at -19.837,32.537 h0.8
  text "MOTO" at 11.989,31.953 h0.8
  text "JYD-TL200-HKB" at -8.56,17.882 h0.8
  text "20-9-22" at -5.69,15.748 h0.8
  text "V1.3" at -4.318,13.894 h0.8
  text "VBAT" at 23.186,-11.737 h0.8
  text "CT1" at -12.649,-13.284 h0.8
  text "TX" at 23.186,-14.14 h0.8
  text "CT3" at -12.624,-14.63 h0.8
  text "DIO" at 10.287,-15.926 h0.8 r90
  text "M3V3" at 11.913,-15.926 h0.8 r90
  text "GND" at 7.417,-15.977 h0.8 r90
  text "CLK" at 8.865,-16.002 h0.8 r90
  text "NRST" at 5.893,-16.027 h0.8 r90
  text "CT2" at -12.649,-16.129 h0.8
  text "RX" at 23.292,-16.129 h0.8
  text "GND" at -12.725,-17.551 h0.8
  text "GND" at 23.292,-18.034 h0.8
  text "V3V" at -23.952,-28.727 h0.8
  text "DECT_L_R" at -23.952,-30.048 h0.8
  text "GND" at -23.901,-31.445 h0.8
  text "SET_KEY" at -23.927,-32.893 h0.8